# EAGLE board brn (EAGLE 6.3)
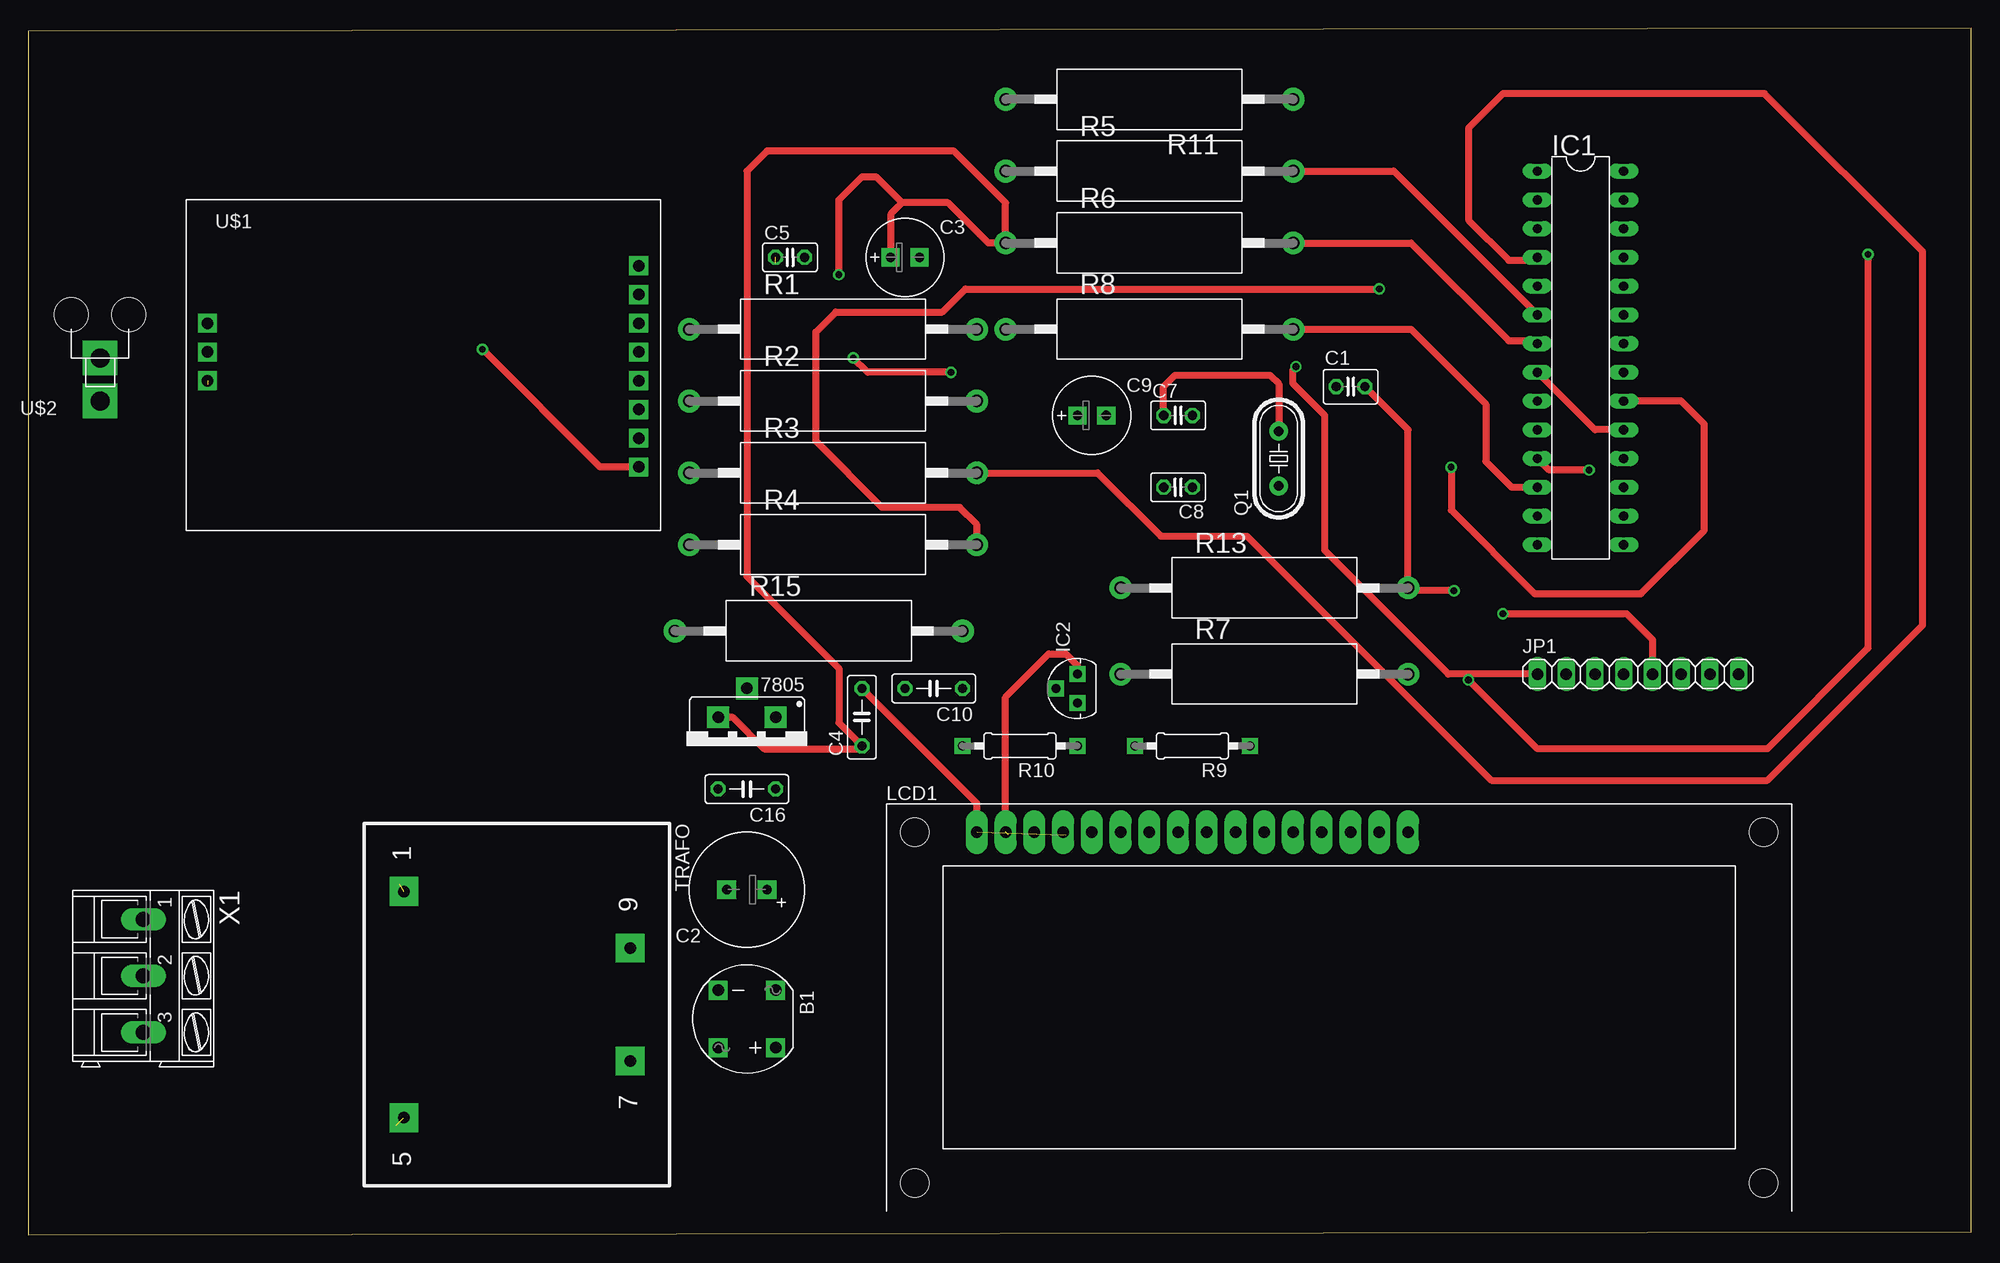
[diagram p0: board, top side]
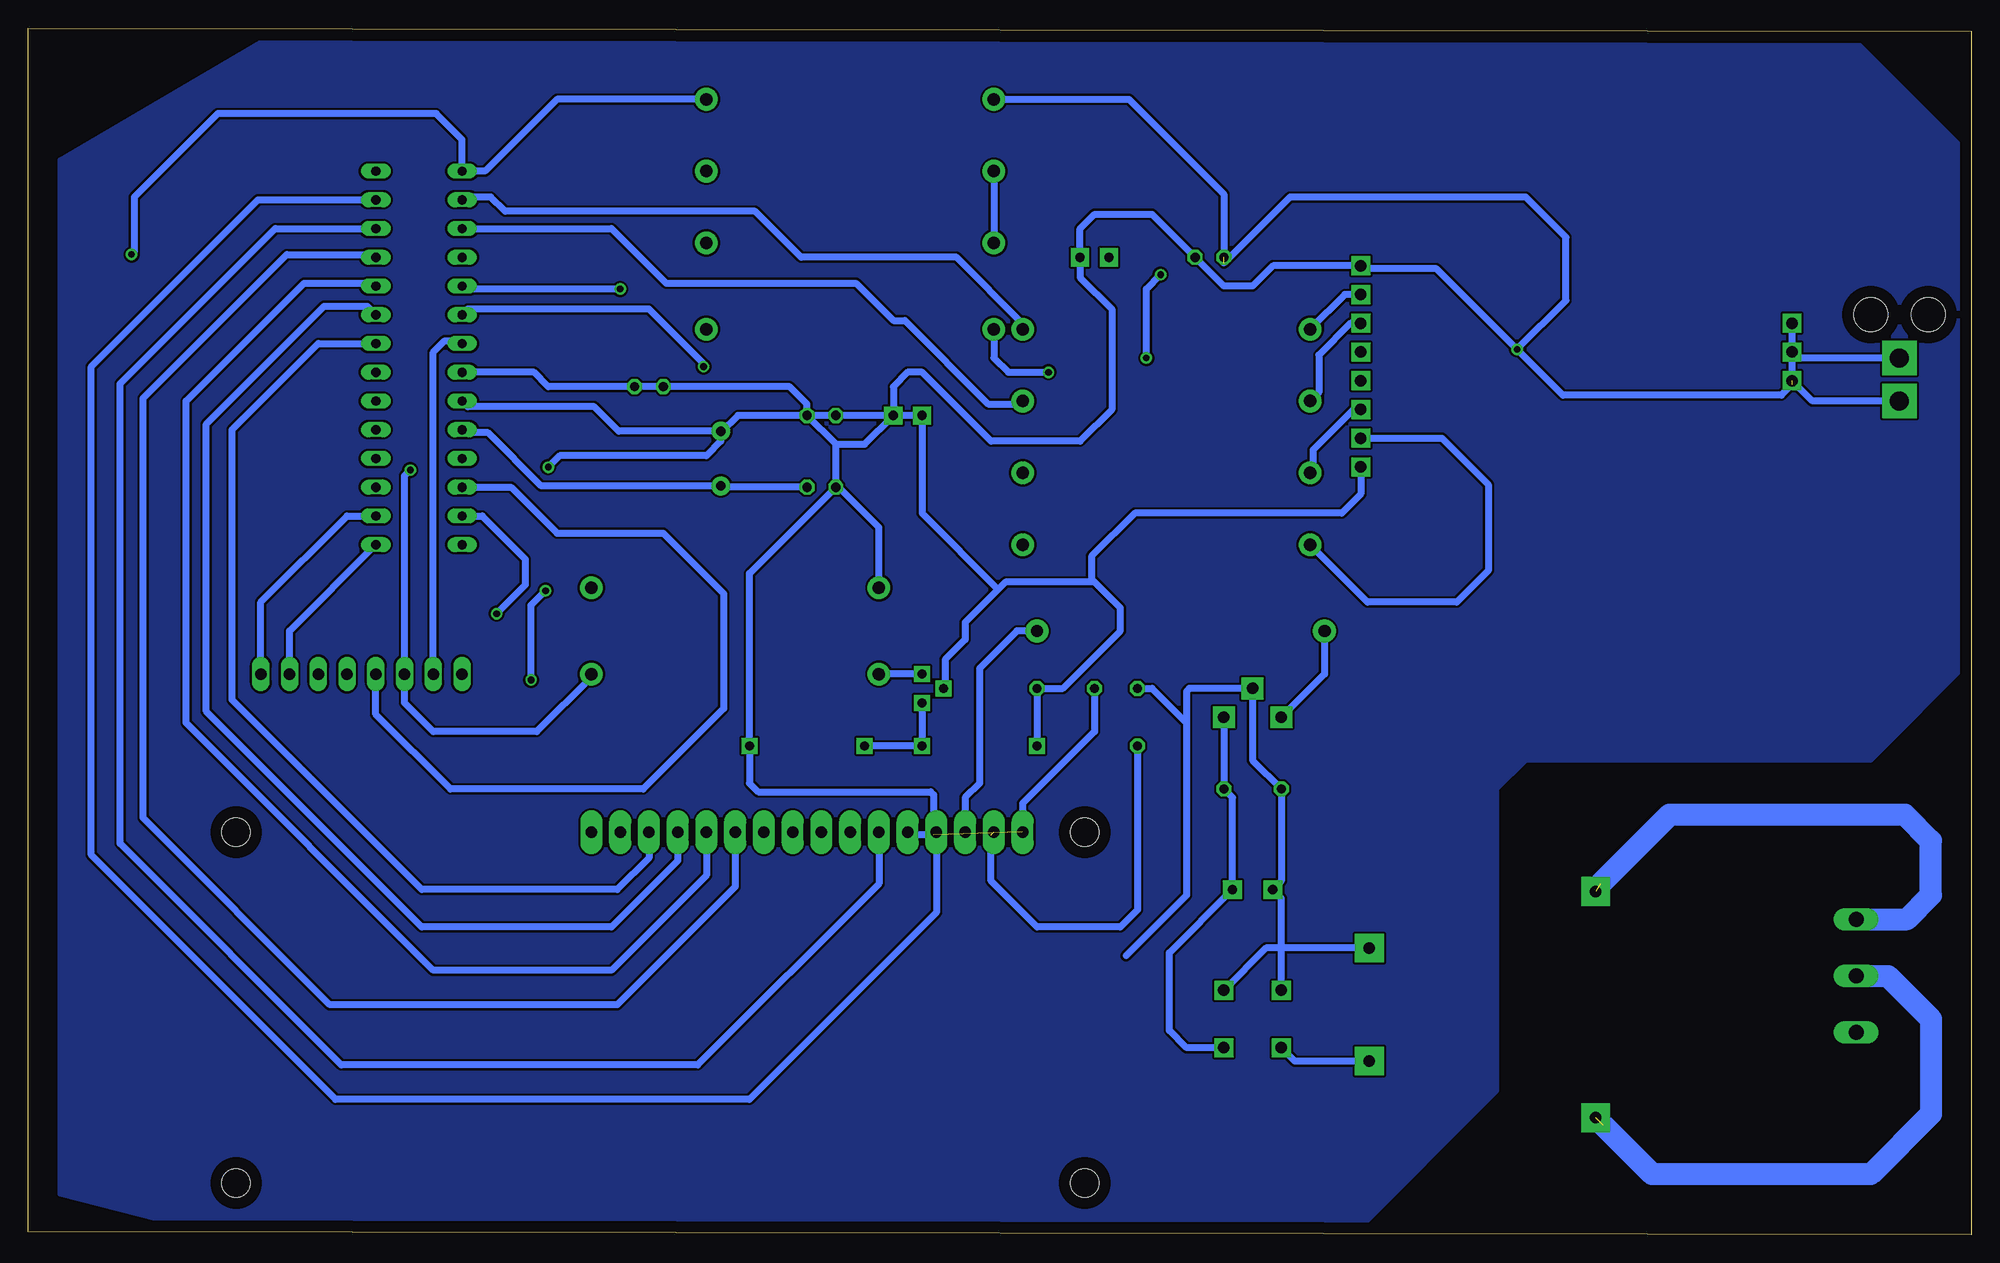
[diagram p1: board, bottom side, seen from below]

Size 171.68 x 106.6 mm. Coordinates in mm from the lower left corner, seen from the top.
Outline: 0,0 171.68,0.25 171.68,106.6 0,106.35 0,0
Copper layers (1*16): Top 0.035mm / dielectric 1.5mm / Bottom 0.035mm
Design rules "default": minimum track width 10mil, minimum drill 24mil, track to track 8mil, track to pad 8mil, pad to pad 8mil, via to via 8mil, smd to smd 8mil, copper to edge 40mil, drill to drill 8mil, minimum pad ring 10mil, minimum via ring 8mil, stop-mask expansion 4mil, vias tented up to drill 0mil, thermal gap 10mil

## Footprints (pad centres in the part's own frame; a part is rotated, then mirrored left to right if it is on the bottom)
78XXS = drill 1.016 pad 1.93 square: GND 0,-5.08; IN -2.54,-2.54; OUT 2.54,-2.54
RB1A = drill 1.016 pad 1.676 square: + -2.54,2.54; - 2.54,-2.54; AC1 2.54,2.54; AC2 -2.54,-2.54
C025-030X050 = drill 0.813 octagon: 1 -1.27,0; 2 1.27,0
E3,5-10 = drill 0.813 pad 1.676 square: + -1.778,0; - 1.778,0
E2,5-7 = drill 0.813 pad 1.6 square: + -1.27,0; - 1.27,0
C050-025X075 = drill 0.813 octagon: 1 -2.54,0; 2 2.54,0
C025-025X050 = drill 0.813 octagon: 1 -1.27,0; 2 1.27,0
DIL28-3 = drill 0.813 long: 1 -16.51,-3.81; 2 -13.97,-3.81; 3 -11.43,-3.81; 4 -8.89,-3.81; 5 -6.35,-3.81; 6 -3.81,-3.81; 7 -1.27,-3.81; 8 1.27,-3.81; 9 3.81,-3.81; 10 6.35,-3.81; 11 8.89,-3.81; 12 11.43,-3.81; 13 13.97,-3.81; 14 16.51,-3.81; 15 16.51,3.81; 16 13.97,3.81; 17 11.43,3.81; 18 8.89,3.81; 19 6.35,3.81; 20 3.81,3.81; 21 1.27,3.81; 22 -1.27,3.81; 23 -3.81,3.81; 24 -6.35,3.81; 25 -8.89,3.81; 26 -11.43,3.81; 27 -13.97,3.81; 28 -16.51,3.81
317L = drill 0.813 pad 1.422 square: 1 -1.27,0; 2 0,1.905; 3 1.27,0
1X08 = drill 1.016 long: 1 -8.89,0; 2 -6.35,0; 3 -3.81,0; 4 -1.27,0; 5 1.27,0; 6 3.81,0; 7 6.35,0; 8 8.89,0
HY-1602F = drill 1 pad 1.93 long: 1 2.54,0; 2 5.08,0; 3 7.62,0; 4 10.16,0; 5 12.7,0; 6 15.24,0; 7 17.78,0; 8 20.32,0; 9 22.86,0; 10 25.4,0; 11 27.94,0; 12 30.48,0; 13 33.02,0; 14 35.56,0; 15 38.1,0; 16 40.64,0 | hole 2.5: -2.96,0; 72.04,0; -2.96,-31; 72.04,-31
HC49/S = drill 0.813 pad 1.676: 1 -2.413,0; 2 2.413,0
AC04 = drill 1.1 pad 2: 1 -12.7,0; 2 12.7,0
0207/10 = drill 0.813 pad 1.422 square: 1 -5.08,0; 2 5.08,0
E3031TRF = drill 1.016 pad 2.54 square: P$1 -10,-10; P$5 10,-10; P$7 5,10; P$9 -5,10
UTR-C12-M = drill 1.016 pad 1.676 square: 1 -17.188,4.333; 2 -17.188,1.796; 3 -17.188,-0.739; 4 20.912,9.421; 5 20.912,6.878; 6 20.912,4.341; 7 20.912,1.801; 8 20.912,-0.742; 9 20.912,-3.282; 10 20.912,-5.817; 11 20.916,-8.358
RG58_RF_CON = drill 1.676 pad 3.048 square: GND 0,7.62; RF 0,3.81 | hole 2.997: -2.54,0; 2.54,0
AK300/3 = drill 1.321 long: 1 -5.004,0; 2 0,0; 3 5.004,0

## Placement (x,y rotation side)
7805  [78XXS]  63.5,43.18 180 top
B1  RB156 KOpru Diyot  [RB1A]  63.5,19.05 180 top
C1  100n  [C025-030X050]  116.84,74.93 0 top
C2  470UF 35V  [E3,5-10]  63.5,30.48 180 top
C3  22uf 16V  [E2,5-7]  77.47,86.36 0 top
C4  100n  [C050-025X075]  73.66,45.72 90 top
C5  100n  [C025-025X050]  67.31,86.36 0 top
C7  18p  [C025-025X050]  101.6,72.39 0 top
C8  18p  [C025-025X050]  101.6,66.04 180 top
C9  10uf 35V  [E2,5-7]  93.98,72.39 0 top
C10  220n  [C050-025X075]  80.01,48.26 180 top
C16  100n  [C050-025X075]  63.5,39.37 180 top
IC1  PIC16876P  [DIL28-3]  137.16,77.47 270 top
IC2  LM317L  [317L]  92.71,48.26 90 top
JP1  [1X08]  142.24,49.53 0 top
LCD1  LCD_2X16_SIL  [HY-1602F]  81.28,35.56 0 top
Q1  4MHz  [HC49/S]  110.49,68.58 90 top
R1  220  [AC04]  71.12,80.01 0 top
R2  220  [AC04]  71.12,73.66 0 top
R3  220  [AC04]  71.12,67.31 0 top
R4  220  [AC04]  71.12,60.96 0 top
R5  220  [AC04]  99.06,93.98 0 top
R6  220  [AC04]  99.06,87.63 0 top
R7  220  [AC04]  109.22,49.53 0 top
R8  220  [AC04]  99.06,80.01 0 top
R9  470R  [0207/10]  102.87,43.18 180 top
R10  330R  [0207/10]  87.63,43.18 180 top
R11  27k  [AC04]  99.06,100.33 180 top
R13  220  [AC04]  109.22,57.15 0 top
R15  10k  [AC04]  69.85,53.34 0 top
TRAFO  12V  [E3031TRF]  43.18,20.32 270 top
U$1  UTR-C12-M  [UTR-C12-M]  33.02,76.2 0 top
U$2  RG58_RF_CON  [RG58_RF_CON]  6.35,81.28 180 top
X1  [AK300/3]  10.16,22.86 270 top

## Library data of the parts
7805 IC2 = v-reg
B1 = rectifier
C1-C5 C7-C10 C16 R9 R10 = rcl
IC1 = microchip; OC_FARNELL: unknown; OC_NEWARK: unknown
JP1 = pinhead
LCD1 = lcd_2x16_led_backlight
Q1 = crystal
R1-R8 R11 R13 R15 = resistor-power; OC_FARNELL: unknown; OC_NEWARK: unknown
TRAFO = UDEA3
U$1 U$2 = UDEA_HAKKI
X1 = con-ptr500; OC_FARNELL: unknown; OC_NEWARK: unknown

## Nets
GND: 7805.GND B1.- C1.1 C2.- C3.- C4.2 C5.2 C7.2 C8.2 C9.- C10.2 C16.2 IC1.8 IC1.19 LCD1.1 LCD1.5 R9.1 R13.1 U$1.1 U$1.3 U$1.4 U$2.GND
N$1: R1.1 U$1.5
N$2: R3.1 U$1.9
N$3: IC1.4 R3.2
N$4: R4.1 U$1.10
N$5: IC1.2 R1.2
N$6: IC1.3 R2.2
N$8: IC1.5 R4.2
N$9: LCD1.3 R15.2
N$10: IC1.6 JP1.1 R5.2
N$11: IC1.7 JP1.2 R6.2
N$12: IC1.11 JP1.3 R7.2
N$13: IC1.12 JP1.4 R8.2
N$14: IC1.13 JP1.5
N$15: JP1.6
N$16: IC1.15 JP1.7
N$17: IC1.16 JP1.8
N$18: IC1.27 LCD1.4
N$19: IC1.26 LCD1.6
N$20: IC1.25 LCD1.11
N$21: IC1.24 LCD1.12
N$22: IC1.23 LCD1.13
N$23: IC1.22 LCD1.14
N$24: TRAFO.P$5 X1.2
N$25: B1.AC1 TRAFO.P$7
N$26: B1.AC2 TRAFO.P$9
N$27: 7805.IN B1.+ C2.+ C16.1
N$28: TRAFO.P$1 X1.1
N$29: IC2.1 R9.2 R10.1
N$31: U$1.2 U$2.RF
N$32: C1.2 IC1.1 R11.1 R13.2
N$34: C7.1 IC1.9 Q1.2
N$35: C8.1 IC1.10 Q1.1
N$37: R2.1 U$1.6
N$38: 7805.OUT C3.+ C4.1 IC2.3 LCD1.2 R5.1 R6.1 R7.1 R8.1 R15.1
N$41: C5.1 C9.+ C10.1 IC1.20 IC2.2 R10.2 R11.2 U$1.11

## Tracks (layer width: path | path; a pad name or v marks a point on that pad's centre or on a via)
GND  (2 unrouted)
  Top 0.61: LCD1.1 83.82,38.1 C4.2 | IC1.19 138.43,71.12 IC1.8
  Bottom 0.61: B1.- 60.96,29.72 C2.- 60.96,31.24 C16.2 63.5,41.91 7805.GND 69.09,48.26 69.34,48.01 69.34,45.21 | C10.2 77.47,44.45 83.82,38.1 LCD1.1 | 69.34,45.21 69.34,29.97 74.68,24.64 | U$2.GND 14.03,73.66 U$1.3 | U$1.1 15.83,75.1 16.76,74.17 36.07,74.17 47.24,85.34 53.66,85.34 U$1.4 61.7,85.62 63.5,83.82 66.04,83.82 C5.2 72.39,90.17 77.47,90.17 78.74,88.9 C3.- 78.74,84.58 75.95,81.79 75.95,72.9 78.74,70.1 86.61,70.1 92.71,76.2 93.98,76.2 95.25,74.93 C9.- 97.79,69.85 100.33,69.85 | C8.2 107.95,58.42 R9.1 107.95,39.88 107.19,39.12 91.95,39.12 91.69,38.86 91.69,35.31 93.73,35.31 LCD1.5 | R13.1 96.52,62.48 99.82,65.79 100.08,65.79 C8.2 | C8.2 100.33,69.85 | 100.33,69.85 C7.2 102.87,73.41 104.39,74.93 C1.1 125.73,74.93 127,76.2 IC1.8 | C4.2 72.39,48.26 69.34,45.21
N$1
  Bottom 0.61: U$1.5 55.35,83.08 R1.1
N$2
  Bottom 0.61: U$1.9 54.59,72.92 58.17,69.34 58.17,67.56 R3.1
N$3
  Top 0.61: R3.2 94.49,67.31 100.08,61.72 107.7,61.72 129.29,40.13 153.67,40.13 167.39,53.85 167.39,86.87 153.42,100.84 130.3,100.84 127.25,97.79 127.25,89.66 130.81,86.11 133.1,86.11 IC1.4
N$4
  Bottom 0.61: U$1.10 46.76,70.38 42.67,66.29 42.67,58.67 45.47,55.88 53.34,55.88 R4.1
N$5
  Bottom 0.61: R1.2 83.82,80.52 89.66,86.36 103.38,86.36 107.44,90.42 129.54,90.42 130.81,91.69 133.1,91.69 IC1.2
N$6
  Bottom 0.61: IC1.3 120.14,88.9 115.32,84.07 98.55,84.07 95.25,80.77 94.23,80.77 86.87,73.41 84.07,73.41 R2.2
N$7
  pour Bottom: 0,50.8 0,95.25 10.16,105.41 151.13,105.41 168.91,95 168.91,3.56 154.94,0 54.61,0 41.91,12.7 41.91,39.37 39.37,41.91 8.89,41.91
N$8  (via drill 0.6)
  Top 0.61: R4.2 83.82,62.74 82.3,64.26 75.44,64.26 69.6,70.1 69.6,79.76 71.37,81.53 80.77,81.53 82.8,83.57 v119.38,83.57
  Bottom 0.61: v119.38,83.57 133.1,83.57 IC1.5
N$9
  Bottom 0.61: R15.2 84.33,53.34 87.63,50.04 87.63,39.88 88.9,38.61 LCD1.3
N$10  (via drill 0.6)
  Top 0.61: R5.2 120.65,93.98 IC1.6 | JP1.1 125.48,49.53 114.55,60.45 114.55,72.39 111.76,75.18 111.76,76.45 v112.01,76.71
  Bottom 0.61: v112.01,76.71 112.01,76.96 116.84,81.79 132.84,81.79 IC1.6
N$11
  Top 0.61: R6.2 122.17,87.63 130.81,78.99 133.1,78.99 IC1.7
  Bottom 0.61: JP1.2 135.89,77.98 134.87,78.99 133.6,78.99 IC1.7
N$12  (via drill 0.6)
  Top 0.61: v137.92,67.56 134.37,67.56 IC1.11
  Bottom 0.61: R7.2 121.92,49.28 126.75,44.45 135.89,44.45 138.43,46.99 JP1.3 138.43,67.06 v137.92,67.56
N$13
  Top 0.61: R8.2 122.17,80.01 128.78,73.41 128.78,68.33 131.06,66.04 IC1.12
  Bottom 0.61: IC1.12 129.03,66.04 124.97,61.98 115.57,61.98 110.24,56.64 110.24,46.48 117.35,39.37 134.37,39.37 140.97,45.97 JP1.4
N$14  (via drill 0.6)
  Top 0.61: v130.3,54.86 141.22,54.86 143.51,52.58 JP1.5
  Bottom 0.61: IC1.13 131.57,63.5 127.76,59.69 127.76,57.4 v130.3,54.86
N$16
  Bottom 0.61: JP1.7 148.59,53.34 IC1.15
N$17
  Bottom 0.61: JP1.8 151.13,55.88 143.51,63.5 IC1.16
N$18
  Bottom 0.61: LCD1.4 91.44,28.45 107.95,11.94 144.53,11.94 166.12,33.53 166.12,76.71 151.38,91.44 IC1.27
N$19
  Bottom 0.61: LCD1.6 96.52,30.99 112.52,14.99 144.02,14.99 163.58,34.54 163.58,75.18 149.86,88.9 IC1.26
N$20
  Bottom 0.61: LCD1.11 109.22,30.73 119.63,20.32 145.03,20.32 161.54,36.83 161.54,73.91 148.84,86.61 141.22,86.61 IC1.25
N$21
  Bottom 0.61: LCD1.12 111.76,31.75 120.14,23.37 135.89,23.37 157.73,45.21 157.73,73.66 147.32,84.07 141.22,84.07 IC1.24
N$22
  Bottom 0.61: LCD1.13 114.3,33.02 120.14,27.18 136.91,27.18 155.96,46.23 155.96,71.63 145.54,82.04 141.73,82.04 IC1.23
N$23
  Bottom 0.61: LCD1.14 116.84,33.27 119.63,30.48 136.91,30.48 153.67,47.24 153.67,71.12 146.05,78.74 IC1.22
N$24  (1 unrouted)
  Bottom 1.93: X1.2 7.37,22.86 3.56,19.05 3.56,10.67 8.89,5.33 28.19,5.33 32.51,9.65
N$25
  Bottom 0.61: TRAFO.P$7 59.77,15.32 B1.AC1
N$26
  Bottom 0.61: TRAFO.P$9 62.31,25.32 B1.AC2
N$27
  Bottom 0.61: B1.+ 69.34,16.51 70.87,18.03 70.87,24.89 C2.+ 65.28,38.61 C16.1 7805.IN
N$28  (1 unrouted)
  Bottom 1.93: X1.1 5.66,27.86 3.56,29.97 3.56,34.8 5.84,37.08 26.67,37.08 32.77,30.99
N$29
  Bottom 0.61: IC2.1 R10.1 R9.2
N$31
  Bottom 0.61: U$2.RF 15.31,77.47 U$1.2
N$32  (via drill 0.6)
  Top 0.61: C1.2 121.92,71.12 R13.2 122.17,56.9 v125.98,56.9 | v162.56,86.61 162.56,51.82 153.67,42.93 133.35,42.93 v127.25,49.02
  Bottom 0.61: v162.56,86.61 162.31,86.87 162.31,91.69 154.94,99.06 135.64,99.06 133.35,96.77 IC1.1 131.32,93.98 124.97,100.33 R11.1 | v127.25,49.02 127.25,55.63 v125.98,56.9
N$34
  Top 0.61: C7.1 100.33,74.93 101.35,75.95 109.73,75.95 110.49,75.18 Q1.2
  Bottom 0.61: Q1.2 119.51,70.99 121.67,73.15 132.84,73.15 IC1.9
N$35
  Bottom 0.61: C8.1 110.36,66.04 Q1.1 126.36,66.17 131.06,70.87 133.1,70.87 IC1.10
N$37
  Bottom 0.61: U$1.6 54.84,80.54 57.66,77.72 57.66,74.42 R2.1
N$38  (via drill 0.6)  (1 unrouted)
  Top 0.61: LCD1.2 86.36,47.5 90.17,51.31 91.69,51.31 92.71,50.29 IC2.3 | 7805.OUT 62.23,45.72 65.02,42.93 73.41,42.93 C4.1 71.63,45.21 71.63,50.04 63.5,58.17 63.5,93.98 65.28,95.76 81.79,95.76 86.36,91.19 R6.1 84.84,87.63 81.28,91.19 77.22,91.19 | 77.22,91.19 76.2,90.17 C3.+ | v81.53,76.2 74.17,76.2 v72.9,77.47 | v71.63,84.84 71.63,91.44 73.66,93.47 74.93,93.47 77.22,91.19
  Bottom 0.61: R15.1 57.15,49.53 7805.OUT 60.71,45.72 | C4.1 73.66,28.7 75.18,27.18 82.55,27.18 86.61,31.24 86.61,35.31 | R5.1 R6.1 | IC2.3 R7.1 | R8.1 86.36,77.47 85.09,76.2 v81.53,76.2 | v72.9,77.47 72.9,83.57 v71.63,84.84
N$41  (via drill 0.6)  (1 unrouted)
  Top 0.61: U$1.11 50.52,67.84 v40.13,78.23 | v125.73,67.82 125.73,64.01 133.1,56.64 142.49,56.64 148.08,62.23 148.08,71.63 146.05,73.66 IC1.20
  Bottom 0.61: R10.2 C10.1 80.26,48.26 75.18,53.34 75.18,55.37 77.47,57.66 | 77.47,57.66 85.34,57.66 85.98,57.02 | 85.98,57.02 88.9,54.1 88.9,52.58 90.68,50.8 90.68,48.39 IC2.2 | 110.49,70.87 108.97,72.39 C9.+ 92.71,63.75 85.98,57.02 | R11.2 74.42,100.33 66.04,91.95 C5.1 | U$1.11 53.94,65.44 55.63,63.75 73.91,63.75 77.72,59.94 77.72,57.91 77.47,57.66 | 66.04,85.85 60.2,91.69 39.37,91.69 35.81,88.14 35.81,82.55 v40.13,78.23 | 110.49,70.87 110.49,71.12 | 110.49,70.87 110.49,70.1 111.76,68.83 124.71,68.83 v125.73,67.82